# Allegro board RC-TranponderV11.brd
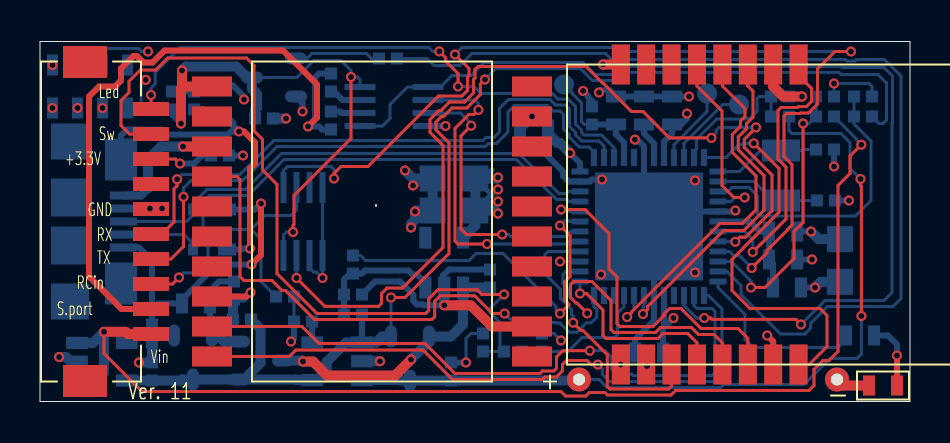
[diagram p0: board, top side]
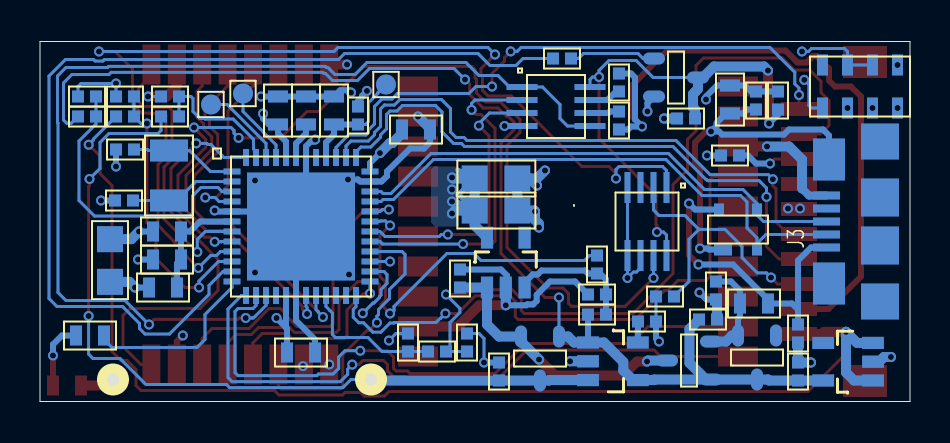
[diagram p1: board, bottom side, seen from below]

Outline 43.5 x 18 mm; copper layers: TOP, INNER_LAYER_2, INNER_LAYER_3, BOTTOM. Coordinates in mm from the lower left corner of the outline.
Outline path: 0,18 0,0 43.5,0 43.5,18 0,18

## Design rules (mm)
constraint set DEFAULT: min track width 0.15
net group DP1: nets USB_N USB_P

## Placement (name value [footprint] x y rotation side)
C1  1uF/10V  [R_0402]  5.6 1.5 270 bottom
C2  20pF  [R_0402]  39.25 12.6 0 bottom
C3  1uF/10V  [R_0402]  20.55 1.5 270 bottom
C4  100uF/4V  [R_0805]  20.7 11.15 0 bottom
C5  20pF  [R_0402]  39.3 10.05 0 bottom
C6  10uF/6V3  [R_0402]  22.5 6.15 270 bottom
C9  100nF  [R_0603]  30.45 2.45 0 bottom
C10  100nF  [R_0603]  24.7 13.6 0 bottom
C11  100nF  [R_0603]  30.2 14.55 270 bottom
C12  100nF  [R_0603]  37.15 8.5 180 bottom
C13  4.7uF  [R_0603]  37.15 7.1 180 bottom
C14  100nF / 10V  [R_0402]  11.2 14.15 180 bottom
C15  1nF  [R_0402]  9.7 5.55 90 bottom
C16  1nF  [R_0402]  5.6 3.4 90 bottom
C17  100nF  [R_0603]  31.6 14.55 270 bottom
C18  100nF  [R_0603]  28.8 14.55 270 bottom
C19  4.7nF / 1kV  [R_0603]  9 15.1 270 bottom
C20  100nF  [R_0402]  25.1 2.95 270 bottom
C21  100nF / 10V  [R_0402]  6.6 15.05 270 bottom
C22  100uF/4V  [R_0805]  20.7 9.55 0 bottom
C23  100uF/4V  [R_0805]  40 7.05 270 bottom
CLK  SWCLK  [R_1MM_TESTPOINT]  33.35 15.4 180 bottom
D4  LSQ976-Z  [R_0603]  42.15 0.8 180 top
D5  PRTR5V0U2X  [R_SOT143B]  8.6 8.6 180 bottom
D6  BAT54C  [R_SOT23_123]  7.65 2.2 90 bottom
D7  BAT54C  [R_SOT23_123]  11.05 2.05 180 bottom
DIO  SWDIO  [R_1MM_TESTPOINT]  34.95 14.85 180 bottom
FB1  470R@100MHz  [R_0603]  37.35 5.7 180 bottom
FB2  BLM18PG471SN1D  [R_0603]  7.8 4.9 0 bottom
J1  10x1_1.25mm DF13 connector  [R_CONN_DF13A-10P-1_25H]  2.85 9 90 top
J3  ZX62-AB-5PA(31)  [R_USB-ZX62-AB-5PA_31_]  1.5 9 90 bottom
Q3  RZR040P01  [R_SOT23]  11.7 16.2 0 bottom
Q4  RZR040P01  [R_SOT23]  18.5 2.15 90 bottom
R3  20k  [R_0402]  13.15 4 0 bottom
R8  100k  [R_0402]  39.25 14.25 180 bottom
R9  430k  [R_0402]  37 14.25 180 bottom
R10  100k  [R_0402]  37 15.25 0 bottom
R11  10k  [R_0402]  39.25 15.25 0 bottom
R13  1k3  [R_0603]  41 3.3 180 bottom
R15  10k  [R_0402]  17.4 17.15 0 bottom
R16  10k  [R_0402]  27.6 14.3 90 bottom
R17  1M  [R_0402]  7.7 15.05 270 bottom
R18  1k  [R_0402]  14.55 15.95 90 bottom
R19  1k  [R_0402]  14.55 14.05 270 bottom
R22  100k  [R_0402]  10.1 4.1 180 bottom
R23  1M  [R_0402]  15.65 4.35 0 bottom
R24  1M  [R_0402]  15.65 6.85 270 bottom
R25  1M  [R_0402]  15.65 5.35 180 bottom
R26  1k  [R_0402]  12.25 5.25 180 bottom
R27  10k  [R_0402]  23.65 2.5 0 bottom
R28  68R  [R_0402]  9 12.3 180 bottom
R29  10k  [R_0402]  22.15 2.95 90 bottom
R30  110k  [R_0402]  41.15 14.25 180 bottom
R31  10k  [R_0402]  41.15 15.25 0 bottom
RESET  RESET  [R_1MM_TESTPOINT]  26.2 15.85 180 bottom
U1  MCP73812  [R_SOT23-5PIN]  16.1 2.95 270 bottom
U2  REG102NA-5  [R_SOT23-5PIN]  1.85 1.05 90 bottom
U3  RT9078-33GJ5  [R_SOT23-5PIN]  21.15 5.7 180 bottom
U4  ATSAMD21G18A-48  [R_QFN48_7X7MM]  30.45 8.75 180 bottom
U6  SN74LVC2G86DCUT  [R_PDSO-G8]  13.15 9 270 bottom
U7  SN74LVC2G86DCUT  [R_PDSO-G8]  17.7 14.75 180 bottom
U8  E28-2G4M20S  [R_RFE28-2G4M20S]  39.6 9.35 90 top
U9  MS5611-01BA03  [R_LGA_8PIN_1_25X2]  2.5 15.75 270 bottom
U10  PA6H  [R_GPS_PA6H]  16.6 9 0 top
UNK+  Vbat+  [TESTPIN-0_6MM]  26.95 1.1 180 bottom
UNK-  Vbat-  [TESTPIN-0_6MM]  39.85 1.1 180 bottom
Y1  32.768kHz  [R_XTAL-ABS07]  37.05 11.3 90 bottom

## Library data of the parts
C1 C3 C4 C6 C9-C14 C17-C23 = CAP NP_0: room: P25
C2 C5 C15 C16 = Cap 0402: room: ATMEL
CLK DIO RESET UNK+ UNK- = TP_0
D4 = LM4040A41IDBZ_1
D5 = TVS_SRV_1: room: USB
D6 D7 = BAT54C: room: serial3
FB1 FB2 = FERRITE_chip_0: room: ATMEL
J1 = CON3_21: room: COMPORT
J3 = USB_CON_3: room: USB
Q3 Q4 = P_MOSFET_SOT223_1: room: PWR
R3 R8-R11 R13 R15-R19 R22-R31 = R2: room: serial3
U1 = MIC4680_9: room: P25
U2 U3 = MIC4680_4: room: P25
U4 = AT91SAM4E-BGA144_6
U6 U7 = MIC4680_15: room: P25
U8 = RJ11_30
U9 = MIC4680_16: room: P25
U10 = RJ11_22
Y1 = CRYSTAL/SM: room: ATMEL

## Footprints (pads in the part's own frame, mm; a bottom-side part is the same pattern mirrored in y, then rotated)
R_1MM_TESTPOINT
  round 1 smd: 1(0,0)
R_0402
  rect 0.6x0.6 smd: 1(-0.45,0) 2(0.45,0)
R_0603
  rect 0.6x1 smd: 1(-0.7,0) 2(0.7,0)
R_0805
  rect 1.3x1.3 smd: 1(-1.067,0) 2(1.067,0)
R_CONN_DF13A-10P-1_25H
  rect 0.7x1.8 smd: 1(-5.625,-2.7) 2(-4.375,-2.7) 3(-3.125,-2.7) 4(-1.875,-2.7) 5(-0.625,-2.7) 6(0.625,-2.7) 7(1.875,-2.7) 8(3.125,-2.7) 9(4.375,-2.7) 10(5.625,-2.7)
  rect 1.6x2.2 smd: 11(7.975,0.6) 12(-7.975,0.6)
R_GPS_PA6H
  round 0.1 hole 3: (0.2,0.8)
  rect 2x1 smd: 1(-8,6.75) 2(-8,5.25) 3(-8,3.75) 4(-8,2.25) 5(-8,0.75) 6(-8,-0.75) 7(-8,-2.25) 8(-8,-3.75) 9(-8,-5.25) 10(-8,-6.75) 11(8,-6.75) 12(8,-5.25) 13(8,-3.75) 14(8,-2.25) 15(8,-0.75) 16(8,0.75) 17(8,2.25) 18(8,3.75) 19(8,5.25) 20(8,6.75)
R_LGA_8PIN_1_25X2
  rect 1.05x0.55 smd: 1(-1.075,1.875) 2(-1.075,0.625) 3(-1.075,-0.625) 4(-1.075,-1.875) 5(1.075,-1.875) 6(1.075,-0.625) 7(1.075,0.625) 8(1.075,1.875)
R_PDSO-G8
  rect 1.55x0.3 smd: 1(-1.7,0.975) 2(-1.7,0.325) 3(-1.7,-0.325) 4(-1.7,-0.975) 5(1.7,-0.975) 6(1.7,-0.325) 7(1.7,0.325) 8(1.7,0.975)
R_QFN48_7X7MM
  rect 0.85x0.3 smd: 1(-3.45,2.75) 2(-3.45,2.25) 3(-3.45,1.75) 4(-3.45,1.25) 5(-3.45,0.75) 6(-3.45,0.25) 7(-3.45,-0.25) 8(-3.45,-0.75) 9(-3.45,-1.25) 10(-3.45,-1.75) 11(-3.45,-2.25) 12(-3.45,-2.75) 25(3.45,-2.75) 26(3.45,-2.25) 27(3.45,-1.75) 28(3.45,-1.25) 29(3.45,-0.75) 30(3.45,-0.25) 31(3.45,0.25) 32(3.45,0.75) 33(3.45,1.25) 34(3.45,1.75) 35(3.45,2.25) 36(3.45,2.75)
  rect 0.3x0.85 smd: 13(-2.75,-3.45) 14(-2.25,-3.45) 15(-1.75,-3.45) 16(-1.25,-3.45) 17(-0.75,-3.45) 18(-0.25,-3.45) 19(0.25,-3.45) 20(0.75,-3.45) 21(1.25,-3.45) 22(1.75,-3.45) 23(2.25,-3.45) 24(2.75,-3.45) 37(2.75,3.45) 38(2.25,3.45) 39(1.75,3.45) 40(1.25,3.45) 41(0.75,3.45) 42(0.25,3.45) 43(-0.25,3.45) 44(-0.75,3.45) 45(-1.25,3.45) 46(-1.75,3.45) 47(-2.25,3.45) 48(-2.75,3.45)
  rect 5.4x5.4 smd: 49(0,0)
R_RFE28-2G4M20S
  rect 2x0.9 smd: 1(-7.5,10.56) 2(-7.5,9.29) 3(-7.5,8.02) 4(-7.5,6.75) 5(-7.5,5.48) 6(-7.5,4.21) 7(-7.5,2.94) 8(-7.5,1.67) 9(7.5,1.67) 10(7.5,2.94) 11(7.5,4.21) 12(7.5,5.48) 13(7.5,6.75) 14(7.5,8.02) 15(7.5,9.29) 16(7.5,10.56)
R_SOT23
  oval 1.1x0.6 smd: 1(1.1,-0.95) 2(1.1,0.95) 3(-1.1,0)
R_SOT23-5PIN
  rect 0.61x1.092 smd: 1(0,0) 2(0.94,0) 3(1.88,0) 4(1.88,2.489) 5(0,2.489)
R_SOT23_123
  oval 1.1x0.6 smd: 1(1.1,-0.95) 2(1.1,0.95) 3(-1.1,0)
R_SOT143B
  rect 0.9x0.6 smd: 1(-0.75,-1)
  rect 0.5x0.6 smd: 2(0.95,-1) 3(0.95,1) 4(-0.95,1)
R_USB-ZX62-AB-5PA_31_
  rect 0.4x1.35 smd: 1(-1.3,2.675) 2(-0.65,2.675) 3(0,2.675) 4(0.65,2.675) 5(1.3,2.675)
  rect 2.1x1.6 smd: 6(3.1,2.55) 7(-3.1,2.55)
  rect 1.9x1.9 smd: 8(1.2,0) 9(-1.2,0)
  rect 1.8x1.9 smd: 10(-4,0) 11(4,0)
R_XTAL-ABS07
  rect 1.1x1.9 smd: 1(-1.25,0) 2(1.25,0)
TESTPIN-0_6MM
  round 1.2 hole 0.6: 1(0,0)

## Nets
+3.3V: C4.2 C9.2 C10.2 C17.2 C22.2 C23.2 FB1.1 Q3.2(S) R16.2 R28.1 U3.5(VOUT) U4.17 U4.36(VDDIO2) U4.44 U8.1(VCC)
GND: C1.1 C2.2 C3.1 C4.1 C5.2 C6.1 C9.1 C10.1 C11.1 C12.1 C13.1 C14.1 C15.1 C16.1 C17.1 C18.1 C19.1 C20.1 C21.1 C22.1 C23.1 D4.2(CATHODE) J1.6 J3.5 R3.1 R10.2 R11.2 R17.1 R22.2 R25.1 R26.1 R29.2 R31.2 U1.2 U2.2 U3.2 U4.5 U4.18 U4.35 U4.42 U4.49 U6.4 U6.5 U6.6 U7.4 U8.2 U8.7 U8.10 U8.16 U9.2 U9.3 U10.3 U10.8 U10.12 U10.19 UNK-.1
VBAT: C3.2 Q4.3 R9.1 U1.3 UNK+.1
VIN: J1.1 R8.1 U2.1 U2.3
VIN_5V: C1.2 D6.3 D7.1 Q4.1 R22.1 R23.2 R30.1 U1.1 U1.4(VDD) U2.5(VOUT)
VIN_5V_10P: R30.2 R31.1 U4.3
VIN_10P: R8.2 R11.1 U4.10
AUX_RX: J1.5 U4.38
AUX_TX: J1.4 U4.37
BARO_CS: U4.27 U9.5
BUSY: U4.20 U8.12
DIO1: U4.4 U8.13
FRSKY_INVERT: U4.15 U7.1 U7.5
FRSKY_RCIN: J1.3 R26.2 U6.2
FRSKY_SMART_PORT: J1.2 R18.2 R19.2
FRSKY_SMART_PORT_RX: U4.30 U7.3
FRSKY_SMART_PORT_TX: U4.29 U7.2
GPS_RX: U4.13 U10.10
GPS_TX: U4.14 U10.9
GPS_VBACKUP: U4.24 U10.4
LED2: R13.2 U4.12
MISO: U4.28 U8.3 U9.6
MOSI: U4.25 U8.4 U9.7
NRESET: U4.19 U8.11
NSS: U4.32 U8.6
POWER_GPS: R15.2 U4.11
POWER_ON: R24.1 U4.31
RCIN: U4.8 U6.7
RESET: C18.2 R16.1 RESET.1 U4.40
RX_EN: U4.48 U8.8
SAFTY_3V3: J1.8 R28.2
SAFTY_LED_N: J1.10 U4.39
SAFTY_SW: J1.9 R27.1 R29.1
SAFTY_SW_FILTERED: C20.2 R27.2 U4.21
SBUS_INVERT: U4.9 U6.1
SCK: U4.26 U8.5 U9.8
TX_EN: U4.7 U8.9
USB_N: D5.2 J3.2 U4.33
USB_P: D5.3 J3.3 U4.34
VGPS: C14.2 C21.2 Q3.3 U6.8(VCC) U7.8(VCC) U9.1(VDD) U10.1(VCC)
VSUPPLY: C6.2 D7.3 Q4.2(S) U3.1
VUSB: C15.2 D6.2(C2) D7.2(C2) FB2.2
XIN32: C2.1 U4.1 Y1.2
XOUT32: C5.1 U4.2 Y1.1
N17065478: C11.2 U4.43
N17065885: C12.2 C13.2 FB1.2 U4.6
N17069937: C16.2 D5.4(VCC) FB2.1 J3.1(VBUS)
N17070561: C19.2 D5.1 J3.6 R17.2
N17071769: R23.1 R24.2 R25.2 U3.3
N17071775: R3.2 U1.5
N17081259: Q3.1 R15.1
N17089733: R9.2 R10.1 U4.47
N17092983: D4.1 R13.1
N17093743: DIO.1 U4.46
N17093750: CLK.1 U4.45
N17097944: R18.1 U7.7
N17097957: R19.1 U7.6

Pads without a net: D6 1; J1 7 11 12; J3 4 7 8 9 10 11; U2 4; U3 4; U4 16 22 23 41; U6 3; U8 14 15; U9 4; U10 2 5 6 7 11 13 14 15 16 17 18 20

## Via types
v1: diameter 0.5, hole 0.3, TOP to BOTTOM, 112 vias

## Routing (per net, layer and track width the routed paths; a pad name or vN(x,y) marks a point on that pad's centre or on a via; arc(x,y) is an arc through that point)
+3.3V: length 23.9
  TOP w0.3: 29.04,1.9 v1(29.04,1.85)
  BOTTOM w0.25: 22.62,9.98 C22.2 22.62,10.4 ; 22.62,11.58 C4.2 22.62,10.3
  BOTTOM w0.3: 31.2,3.7 31.15,3.65 C9.2 ; 31.2,3.7 U4.17 ; 31.2,3.7 v1(31.68,4.17) ; Q3.2 13.13,14.92 v1(13.13,14.5) ; R16.2 27.6,15.02 27.4,15.22 27.4,15.28 v1(27.15,15.53) ; U4.44 31.2,13 31.6,13.4 C17.2 32.05,13.85 32.35,14.15 v1(32.35,14.39) ; v1(26.5,12.42) 27,11.92 U4.36 ; FB1.1 v1(38.75,5.7) ; R28.1 v1(10.15,12.3)
  BOTTOM w0.5: v1(26.5,12.42) 26,12.92 25.88,12.92 25.4,13.4 C10.2 ; C22.2 22.75,9.55 v1(22.9,9.4) ; C22.2 21.77,8.81 U3.5 ; C22.2 C4.2 22.85,11.15 v1(22.9,11.2) ; v1(38.75,5.7) 39.03,5.98 C23.2
  vias: v1(22.9,10.6) v1(22.9,10)
GND: length 100.2
  TOP w0.3: 28.2,16.9 v1(28.15,16.85) ; U10.8 10.33,5.25 v1(10.52,5.45) ; 36.66,16.9 U8.10 ; v1(36.36,3.3) 36.66,3 U8.7 ; 30.31,1.9 U8.2
  TOP w0.5: UNK-.1 40.15,0.8 D4.2 ; U8.10 36.66,15.75 37.16,15.25 v1(38.1,15.25) ; v1(20.21,4.81) 21.54,4.81 22.6,3.75 U10.12 ; v1(28.15,16.85) U8.16 ; U10.3 v1(7.15,12.75) ; U8.2 30.31,1.81 v1(30.35,1.77)
  INNER_LAYER_2 w0.25: UNK-.1 40.65,1.1 ; UNK-.1 39.85,1.9 ; UNK-.1 39.05,1.1 ; UNK-.1 39.85,0.3
  BOTTOM w0.15: U6.4 U6.5 v1(14.12,6.17) 13.83,6.47 13.68,6.47 13.48,6.67 13.48,7.3 ; R29.2 21.55,3.4 21.3,3.15 v1(21.3,1.95) ; R11.2 v1(39.7,15.9) 41.45,15.9 41.6,15.75 R31.2 ; C20.1 25.7,3.4 v1(26.05,3.05) ; U9.2 U9.3 3.12,17.5 3.27,17.65 4.92,17.65 5.08,17.5 v1(5.4,17.5) ; v1(20.27,13.78) U7.4 19.05,13.78 ; R26.1 R3.1 ; v1(38.1,15.25) R10.2
  BOTTOM w0.3: C6.1 20.45,6.6 20.15,6.3 20.15,5.76 U3.2 ; v1(10.2,15.1) 10.2,15.25 9.65,15.8 C19.1 8.25,15.8 7.95,15.5 R17.1 C21.1 ; v1(27.95,15.45) 28.06,15.56 28.49,15.56 C18.1 C11.1 C17.1 v1(32.45,15.25) ; v1(28.1,11.1) 27.6,11.1 27.5,11 U4.35 26.43,11 26.15,11.28 26.15,11.5 25,12.65 24.3,12.65 24,12.95 C10.1 ; C15.1 10.17,5.1 v1(10.52,5.45) ; C13.1 v1(38.6,7.1) ; v1(34.77,9.55) 34.72,9.5 U4.5 31.2,9.5 U4.49 30.7,8.5 U4.18 30.7,4.05 29.75,3.1 C9.1 ; C3.1 v1(21.3,1.95) ; v1(29.74,13.09) 29.84,13 29.96,13 30.2,12.76 U4.42 30.2,10.45 ; v1(12.55,3) 12.7,3.15 R3.1 ; R25.1 16.75,6 18,6 18.67,5.33 18.67,5.03 18.84,4.85 19.15,4.85 19.19,4.81 v1(20.21,4.81) ; C12.1 v1(38.55,8.5) ; C2.2 v1(39.7,11.75) ; C5.2 v1(40.45,10.05)
  BOTTOM w0.4: J3.5 5.05,10.3 5.4,10.65
  BOTTOM w0.5: C14.1 v1(12.3,14.15) ; U1.2 v1(17,2.01) ; C10.1 24,13.65 v1(24.6,14.25) ; C15.1 9.65,5.05 R22.2 ; v1(4.95,1.95) C1.1 C16.1 ; 19,11.15 v1(18.65,10.8) ; 19,11.15 18.65,11.15 v1(18.25,11.55) ; 19,11.15 C4.1 C22.1 18.8,9.55 v1(18.75,9.5) 18.75,9.09 18.57,8.9 18.57,8.72 v1(18.55,8.7) ; v1(38.55,8.5) 38.93,8.12 C23.1 ; v1(0.95,2.23) 1.14,2.23 1.3,2.22 1.53,1.99 U2.2 ; U3.2 v1(20.21,4.81) ; 5.4,10.65 5.4,12.1 6.05,12.75 v1(7.15,12.75)
  vias: v1(5.5,9.65) v1(6.1,9.65) v1(28.05,6.35) v1(32.75,11.05) v1(32.75,6.45)
VBAT: length 40.7
  TOP w0.15: v1(41.07,4.28) 41.07,10.75 41.02,10.8 v1(41.02,11.12)
  BOTTOM w0.15: R9.1 37.45,13.55 37.6,13.4 40.05,13.4 40.5,12.95 40.5,11.65 v1(41.02,11.12) ; UNK+.1 27.95,1.1 28.36,0.69 34.02,0.69 34.17,0.85 38.2,0.85 39.5,2.15 40.85,2.15 41.07,2.37 v1(41.07,4.28)
  BOTTOM w0.5: U1.3 18.03,1.07 18.05,1.05 Q4.3 C3.2 26.9,1.05 UNK+.1
VIN: length 60.5
  TOP w0.15: v1(3.2,3.48) 3.2,2.4 5.1,0.5 26.05,0.5 26.27,0.28 27.29,0.28 27.47,0.45 28.25,0.45 28.37,0.33 31.55,0.33 31.78,0.55 38.45,0.55 38.7,0.8 38.7,1.6 39.15,2.05 39.45,2.05 39.9,2.5 39.9,10.8 40.5,11.4 40.5,12.28 v1(41.06,12.84)
  TOP w0.5: v1(3.2,3.48) 4.29,3.48 4.4,3.38 J1.1
  BOTTOM w0.15: v1(41.06,12.84) 40.83,13.07 40.83,13.12 R8.1
  BOTTOM w0.5: U2.1 2.8,1.05 3.2,1.45 v1(3.2,3.48) 2.65,2.93 U2.3
VIN_5V: length 59.3
  TOP w0.15: v1(22.25,16.1) 22.02,15.87 22.02,15.35 21.35,14.68 20.6,14.68 20.18,14.25 20.08,14.25 19.8,13.97 19.8,13.58 20.45,12.93 20.45,7.4 18.25,5.2 v1(17.55,5.2)
  BOTTOM w0.15: v1(22.25,16.1) 22.8,16.65 27.03,16.65 27.63,16.05 28.87,16.05 29.22,16.4 29.3,16.4 29.36,16.46 39.94,16.46 40.05,16.35 41.9,16.35 42.33,15.93 42.33,14.07 42.16,13.91 41.94,13.91 R30.1 ; Q4.1 v1(17.55,5.2)
  BOTTOM w0.3: R23.2 U1.1
  BOTTOM w0.5: 10.2,1.1 11.03,1.93 11.03,3.62 R22.1 ; 10.2,1.1 12.79,1.1 12.81,1.07 U1.4 13.85,1.07 14.33,1.55 14.33,1.98 15.3,2.95 U1.1 16.8,2.95 17.1,3.25 Q4.1 ; 10.2,1.1 D7.1 D6.3 7.1,1.1 7.05,1.05 C1.2 U2.5
VIN_5V_10P: length 14.7
  BOTTOM w0.15: R31.1 R30.2 40.7,13.88 41.55,13.03 41.55,10.05 40.77,9.28 36.01,9.28 35.88,9.41 35.88,10.28 35.45,10.7 34.6,10.7 34.4,10.5 U4.3
VIN_10P: length 13.9
  TOP w0.15: v1(35.55,5.7) 36.25,5.7 37.7,7.15 37.7,8.5 38.15,8.95 v1(38.15,13.9)
  BOTTOM w0.15: v1(35.55,5.7) 35.55,6.03 34.58,7 U4.10 ; v1(38.15,13.9) 38.45,13.9 R8.2 R11.1
AUX_RX: length 29.4
  TOP w0.15: v1(6.86,11.11) 6.86,10.79 6.7,10.63 6.7,8.97 6.1,8.38 J1.5
  BOTTOM w0.15: v1(6.86,11.11) 7.09,11.34 9.99,11.34 11.7,13.05 22.15,13.05 22.3,13.2 22.7,13.2 22.98,13.48 22.98,14.65 23.43,15.1 25.5,15.1 25.78,14.82 26.28,14.82 26.48,14.63 26.48,13.75 26.77,13.45 26.77,13.33 27.08,13.03 27.95,13.03 28.2,12.78 U4.38
AUX_TX: length 29.4
  TOP w0.15: v1(7.17,10.23) 7.17,7.75 6.55,7.12 J1.4
  BOTTOM w0.15: U4.37 27.7,12.47 27.45,12.72 26.96,12.72 26.48,13.21 26.48,13.33 26.18,13.63 26.18,14.35 26,14.53 25.65,14.53 25.38,14.8 23.73,14.8 23.4,14.47 23.4,13.48 22.82,12.9 22.42,12.9 22.27,12.75 11.85,12.75 10.2,11.1 10.17,11.1 10.12,11.04 7.54,11.04 7.17,10.68 v1(7.17,10.23)
BARO_CS: length 45.8
  INNER_LAYER_3 w0.15: v1(5.29,16.08) 5.16,15.95 4.9,15.95 4.55,15.6 4.55,14.6 2.7,12.75 2.7,2.25 3.55,1.4 23.25,1.4 23.4,1.55 23.4,3.45 26,6.05 v1(26,7)
  BOTTOM w0.15: v1(5.29,16.08) 5.06,15.85 5.06,14.81 4.92,14.68 U9.5 ; U4.27 v1(26,7)
BUSY: length 18.4
  TOP w0.15: 34.12,16.9 U8.12 34.12,15.78 35.25,14.64 35.25,14.25 35.02,14.02 35.02,13.77 34.97,13.72 34.97,13.71 34.61,13.35 34.61,12.46 35.8,11.28 35.8,9.59 35.11,8.9 34,8.9 29.58,4.48 29.58,4.45 v1(29.35,4.22)
  BOTTOM w0.15: v1(29.35,4.22) 29.58,4.45 29.58,4.48 29.7,4.6 U4.20
DIO1: length 9.4
  TOP w0.15: U8.13 32.85,15.78 34.1,14.53 34.1,10.8 34.7,10.2 v1(35.24,10.2)
  BOTTOM w0.15: U4.4 34.55,10 34.74,10.2 v1(35.24,10.2)
FRSKY_INVERT: length 52.1
  TOP w0.15: v1(33.21,4.17) 33.54,4.17 33.61,4.11 37.79,4.11 v1(38.05,3.85)
  BOTTOM w0.15: v1(38.05,3.85) 39.25,5.05 42.2,5.05 42.6,5.45 42.6,13.93 42.62,13.95 42.62,16.27 42.2,16.7 40.12,16.7 40.07,16.76 29.23,16.76 29.18,16.7 29.1,16.7 28.75,16.35 27.75,16.35 27.15,16.95 22.2,16.95 21.55,16.3 20.6,16.3 20.02,15.72 U7.1 18.38,15.72 17.5,14.85 17.5,14.15 17.12,13.78 U7.5 15.65,13.78 ; v1(33.21,4.17) 32.89,4.17 32.88,4.18 32.82,4.18 32.2,4.8 U4.15
FRSKY_RCIN: length 14.1
  TOP w0.15: J1.3 6.62,5.88 v1(6.95,6.2)
  BOTTOM w0.15: v1(6.95,6.2) 7.18,6.43 7.63,6.43 8.4,7.2 8.4,7.75 9.25,8.6 10.55,8.6 ; R26.2 11.05,6 11.05,8.11 10.55,8.6 ; U6.2 12.82,9.57 12.55,9.3 11.25,9.3 10.55,8.6
FRSKY_SMART_PORT: length 33.4
  TOP w0.3: v1(13.4,13.75) 13.85,14.2 13.85,15.85 12.15,17.55 6.23,17.55 5.63,16.95 5.17,16.95 4.85,17.27 4.67,17.27 4.05,16.65 4.05,16.05 3.75,15.75 2.95,15.75 2.45,15.25 2.45,6.25 4.08,4.62 J1.2
  BOTTOM w0.3: R18.2 13.95,16.4 13.75,16.2 13.75,14.1 v1(13.4,13.75) 13.95,13.75 14.1,13.6 R19.2
FRSKY_SMART_PORT_RX: length 14.4
  TOP w0.15: v1(23.11,8.35) 21.32,8.35 21.05,8.62 21.05,13.28 v1(21.56,13.79)
  BOTTOM w0.15: U4.30 26.5,8.5 26.25,8.25 23.54,8.25 23.44,8.35 v1(23.11,8.35) ; 19.05,14.43 U7.3 21.02,14.43 21.45,14 21.45,13.9 21.48,13.88 21.48,13.87 v1(21.56,13.79)
FRSKY_SMART_PORT_TX: length 16.8
  TOP w0.15: v1(22.35,7.88) 20.9,7.88 20.75,8.03 20.75,13.66 21.44,14.35 21.69,14.35 v1(21.92,14.58)
  BOTTOM w0.15: v1(22.35,7.88) 26.38,7.88 26.5,8 U4.29 ; 19.05,15.07 U7.2 21.75,15.07 21.92,14.9 v1(21.92,14.58)
GPS_RX: length 32.1
  TOP w0.15: U10.10 12.47,2.25 12.8,2.58 19.15,2.58 20.63,1.1 25.12,1.1 25.25,1.23 25.82,1.23 26.12,1.53 26.12,1.85 26.32,2.05 27.36,2.05 27.56,1.85 v1(27.89,1.85)
  BOTTOM w0.15: U4.13 33.42,5.3 34.1,4.62 34.1,1.2 33.89,0.99 28.48,0.99 28.12,1.36 28.12,1.62 v1(27.89,1.85)
GPS_TX: length 32.6
  TOP w0.15: U10.9 13.1,3.75 13.95,2.9 19.25,2.9 20.75,1.4 25,1.4 25.12,1.52 25.69,1.52 25.82,1.66 25.82,2.23 26.14,2.54 v1(27.49,2.54)
  BOTTOM w0.15: U4.14 32.7,4.8 32.85,4.65 33.6,4.65 33.75,4.5 33.75,1.45 33.6,1.29 29.66,1.29 29.58,1.38 28.84,1.38 28.56,1.65 28.56,2.22 28.25,2.54 v1(27.49,2.54)
GPS_VBACKUP: length 28.2
  TOP w0.15: v1(23.23,4.4) 22.62,4.4 21.74,5.29 20.01,5.29 19.74,5.01 19.74,4.24 19.6,4.1 13.73,4.1 12.28,5.55 12.1,5.55 11.6,6.05 10.2,6.05 10,6.25 10,11.1 9.85,11.25 U10.4
  BOTTOM w0.15: v1(23.23,4.4) 23.46,4.17 23.48,4.17 23.7,3.95 25.78,3.95 25.8,3.92 26,3.92 26.46,3.47 26.85,3.47 27.32,3.94 27.56,3.94 27.84,4.21 27.84,4.61 27.7,4.74 U4.24
LED2: length 9
  BOTTOM w0.15: R13.2 40.3,3.1 39.9,2.7 35.65,2.7 35.25,3.1 35.25,4.35 33.9,5.7 U4.12
MISO: length 55.5
  TOP w0.15: U8.3 31.58,0.78 31.43,0.62 28.5,0.62 28.37,0.76 28.37,2.33 27.15,3.55 27.05,3.55 v1(26.66,3.94)
  INNER_LAYER_3 w0.15: v1(3.12,14.68) 1.95,13.5 1.95,1.65 2.95,0.65 24.2,0.65 24.35,0.8 24.35,3.1 25.18,3.92 26.2,3.92 26.21,3.94 v1(26.66,3.94)
  BOTTOM w0.15: v1(26.66,3.94) 26.66,4.27 26.57,4.35 26.57,4.6 26.02,5.15 26.02,5.61 25.25,6.38 25.25,7.35 25.4,7.5 U4.28
MOSI: length 53.5
  TOP w0.15: v1(27,5.4) 27.32,5.4 28.15,4.58 28.15,3.3 28.3,3.15 30.9,3.15 31.15,3.4 32.38,3.4 32.85,2.94 U8.4
  INNER_LAYER_3 w0.15: v1(1.88,14.68) 1.88,15.05 2.02,15.2 3.55,15.2 3.7,15.05 3.7,14.25 2.3,12.85 2.3,1.9 3.15,1.05 23.6,1.05 23.95,1.4 23.95,3.2 26.15,5.4 v1(27,5.4)
  BOTTOM w0.15: v1(27,5.4) U4.25
NRESET: length 17.5
  TOP w0.15: 35.39,16.9 U8.11 35.39,15.78 35.65,15.52 35.65,14.22 35.33,13.9 35.33,13.65 35.27,13.59 35.27,13.59 34.91,13.23 34.91,12.59 36.2,11.3 36.2,9.56 35.19,8.55 34.18,8.55 30.38,4.75 30.38,4.61 v1(30.15,4.38)
  BOTTOM w0.15: U4.19 30.2,4.75 30.15,4.7 v1(30.15,4.38)
NSS: length 17.5
  TOP w0.15: U8.6 35.39,3.16 34.9,3.65 33.05,3.65 32.05,4.65 31.48,4.65 31.2,4.37 31.2,4.3 30.65,3.75 29,3.75 28.85,3.9 28.85,6.22 28.45,6.62 28.45,8.4 27.25,9.6 v1(26.06,9.6)
  BOTTOM w0.15: U4.32 26.5,9.5 26.45,9.55 26.43,9.55 26.38,9.6 v1(26.06,9.6)
POWER_GPS: length 48.8
  BOTTOM w0.15: R15.2 19.35,17.15 19.7,16.8 21,16.8 21.6,17.4 28.27,17.4 28.57,17.1 40.28,17.1 40.35,17.02 40.75,17.02 40.82,17.1 42.22,17.1 43.05,16.27 43.05,5.15 42.65,4.75 39.37,4.75 38.52,3.9 38.52,3.65 38.25,3.38 37.02,3.38 35.05,5.35 35.05,5.8 34.35,6.5 U4.11
POWER_ON: length 18.1
  TOP w0.15: v1(26,8.8) 26.5,8.3 26.5,6.25 26.23,5.97 26.23,5.08 26.45,4.85 v1(26,4.4)
  BOTTOM w0.15: R24.1 16.02,7.3 16.27,7.05 21.45,7.05 21.8,7.4 23.15,7.4 25.8,4.75 25.8,4.55 25.95,4.4 v1(26,4.4) ; v1(26,8.8) 26.23,9.03 26.47,9.03 26.5,9 U4.31
RCIN: length 45.4
  TOP w0.15: v1(34.76,7.99) 34.99,8.22 35.28,8.22 36.6,9.54 36.6,11.32 35.21,12.71 35.21,13.1 35.57,13.46 35.57,13.47 v1(35.8,13.7) ; v1(33.57,13.18) 31.47,13.18 30.15,14.5 29.57,14.5 28.15,15.93 28.12,15.93 27.3,16.75 21.9,16.75 21.75,16.6 21.75,16.18 21.68,16.1 21.68,15.43 21.22,14.97 20.48,14.97 20.05,14.55 19.95,14.55 19.5,14.1 19.5,13.45 20.15,12.8 20.15,7.7 18.12,5.67 17.35,5.67 17.07,5.4 17.07,4.91 16.93,4.76 14.24,4.76 v1(12.82,6.17)
  BOTTOM w0.15: v1(34.76,7.99) 34.44,7.99 34.42,8 U4.8 ; v1(33.57,13.18) 33.8,13.41 33.8,13.55 33.95,13.7 v1(35.8,13.7) ; U6.7 v1(12.82,6.17)
RESET: length 5.8
  BOTTOM w0.15: RESET.1 26.61,15.44 26.61,15.41 27.07,14.94 27.07,14 27.23,13.85 R16.1
  BOTTOM w0.3: U4.40 29.2,12.95 28.8,13.35 C18.2 R16.1
RX_EN: length 20.2
  TOP w0.15: v1(35.69,12.91) 36.95,11.65 36.95,9.46 35.16,7.67 35.16,7.66 34.6,7.1 34.6,5.55 35.5,4.65 39,4.65 39.35,4.3 39.35,2.75 38.45,1.85 U8.8
  BOTTOM w0.15: U4.48 34.3,12.2 34.95,12.85 35.1,12.85 35.16,12.9 35.36,12.9 35.36,12.91 v1(35.69,12.91)
SAFTY_3V3: length 3.3
  TOP w0.15: J1.8 6.77,12.12 v1(7,11.9)
  BOTTOM w0.3: R28.2 8.1,12.3 7.7,11.9 v1(7,11.9)
SAFTY_LED_N: length 29
  TOP w0.15: v1(20.9,15.75) 20.9,16.4 20.27,17.03 20.27,17.2 v1(19.97,17.51) ; v1(5.55,15.32) J1.10
  BOTTOM w0.15: v1(19.97,17.51) 19.64,17.51 19.45,17.7 7,17.7 5.76,16.46 5.76,15.88 5.55,15.67 v1(5.55,15.32) ; U4.39 28.7,12.7 28.07,13.32 27.21,13.32 27.07,13.46 27.07,13.58 26.77,13.88 26.77,14.75 26.4,15.12 25.9,15.12 25.62,15.4 22.05,15.4 21.7,15.75 v1(20.9,15.75)
SAFTY_SW: length 39.4
  TOP w0.15: v1(23.2,5.35) 22.1,5.35 21.86,5.59 19.89,5.59 19.44,5.13 19.44,4.55 19.29,4.4 13.85,4.4 11.85,6.4 11.85,10.85 11.12,11.57 11.12,13.11 10.7,13.53 10.7,16.8 10.33,17.18 6.38,17.18 5.78,16.57 5.02,16.57 4.45,16.01 4.45,15.45 4.05,15.05 4.05,13.8 4.48,13.38 J1.9
  BOTTOM w0.15: v1(23.2,5.35) 22.51,4.66 22.51,4.44 23,3.95 23,2.7 R27.1 R29.1
SAFTY_SW_FILTERED: length 7.2
  BOTTOM w0.15: U4.21 29.2,4.75 29,4.55 29,4.54 28.88,4.42 28.88,3.35 28.73,3.2 27.1,3.2 26.4,2.5 C20.2 R27.2
SBUS_INVERT: length 51.1
  TOP w0.15: v1(14.7,11.15) 14.7,11.4 15.05,11.75 16.4,11.75 19.93,15.28 21.1,15.28 21.38,15.55 21.38,16.22 21.45,16.3 21.45,16.65 v1(20.75,17.35) ; v1(40.55,17.5) 39.75,17.5 38.88,16.62 38.88,14.88 38.42,14.43 38.03,14.43 38,14.4 37.33,14.4 37.2,14.28 37.2,12.24 37.6,11.84 37.6,8.82 37.4,8.62 37.4,8.6 36.35,7.55 36.35,7.44 v1(35.59,6.68)
  BOTTOM w0.15: v1(35.59,6.68) 34.96,7.3 34.68,7.3 34.48,7.5 U4.9 ; 12.18,10.7 12.18,11.55 12.38,11.75 14.55,11.75 14.7,11.6 v1(14.7,11.15) ; v1(20.75,17.35) 21.1,17.7 28.6,17.7 28.8,17.5 v1(40.55,17.5)
SCK: length 59.5
  TOP w0.15: v1(27.36,4.41) 26.85,4.92 26.8,4.92 26.52,5.2 26.52,5.85 26.68,6 27.6,6 28.55,5.05 28.55,3.6 28.7,3.45 30.77,3.45 31.02,3.7 32.58,3.7 32.93,3.35 33.7,3.35 34.12,2.94 U8.5
  INNER_LAYER_3 w0.15: v1(27.36,4.41) 27.13,4.18 27.13,3.74 26.85,3.47 26.46,3.47 26.3,3.62 25.52,3.62 24.65,2.75 24.65,0.68 24.32,0.35 2.58,0.35 1.5,1.43 1.5,13.8 v1(0.62,14.68)
  BOTTOM w0.15: v1(27.36,4.41) 26.85,4.92 26.8,4.92 26.52,5.2 26.52,5.25 26.45,5.32 26.45,5.6 26.32,5.72 26.32,5.73 26.15,5.9 26.15,6.35 26.3,6.5 U4.26
TX_EN: length 14.4
  TOP w0.15: U8.9 37.93,16.3 38.58,15.65 38.58,15 38.32,14.75 37.93,14.75 37.88,14.7 37.05,14.7 36.9,14.55 36.9,12.12 37.3,11.72 37.3,9.12 36.05,7.87 36.03,7.87 v1(35.64,7.48)
  BOTTOM w0.15: v1(35.64,7.48) 35.64,8.1 35.24,8.5 U4.7
USB_N: length 26.8
  BOTTOM w0.15: 7.65,7.9 7.65,8.18 8.15,8.68 8.15,9.98 8.47,10.3 10.4,10.3 12.2,12.1 23.83,12.1 25.83,10.1 26.35,10.1 26.45,10 U4.33 ; 7.65,7.9 7.2,8.35 J3.2 ; 7.65,7.9 D5.2
USB_P: length 25.4
  BOTTOM w0.15: J3.3 7.32,9 7.65,9.33 D5.3 7.65,9.9 8.35,10.6 10.28,10.6 12.08,12.4 23.95,12.4 25.95,10.4 26.35,10.4 26.45,10.5 U4.34
VGPS: length 35
  TOP w0.15: v1(15.55,16.23) 15.55,13.15 12.7,10.3 12.7,8.85 12.65,8.8 v1(12.65,8.47)
  TOP w0.3: 7.1,15.8 7.15,15.75
  TOP w0.5: v1(7.05,13.9) 7.05,15.65 7.15,15.75 U10.1 ; v1(7.1,16.55) 7.1,15.8
  INNER_LAYER_3 w0.15: v1(7.1,16.55) 5.75,16.55 5.3,17 1.12,17 0.95,16.82 v1(0.62,16.82)
  BOTTOM w0.15: Q3.3 12.84,16.2 13.69,17.05 15.05,17.05 15.55,16.55 v1(15.55,16.23) 15.88,16.23 16,16.1 U7.8 ; 12.18,7.3 12.18,8.32 12.33,8.47 v1(12.65,8.47)
  BOTTOM w0.3: v1(7.05,13.9) 6.6,14.35 C21.2
  BOTTOM w0.5: v1(7.1,16.55) 7.3,16.75 9.8,16.75 10.35,16.2 Q3.3 10.6,15.63 10.75,15.48 10.75,15.47 10.85,15.37 10.85,14.7 10.75,14.6 C14.2
VSUPPLY: length 13.7
  TOP w0.5: v1(13.15,2) 13.65,2 14.35,1.3 17.75,1.3 v1(18.55,2.1)
  BOTTOM w0.5: C6.2 U3.1 21.15,3.85 20.55,3.25 Q4.2 19.45,3 v1(18.55,2.1) ; v1(13.15,2) 13.1,2.05 D7.3
VUSB: length 5.2
  BOTTOM w0.3: C15.2 8.95,6 8.5,5.55 FB2.2 8.5,4.25 8.6,4.15 D6.2
  BOTTOM w0.5: D6.2 8.9,3.3 9.2,3 D7.2
XIN32: length 5.4
  BOTTOM w0.15: U4.1 34.98,11.5 36.02,12.55 Y1.2 38.08,12.55 38.12,12.6 C2.1
XOUT32: length 5.3
  BOTTOM w0.15: C5.1 Y1.1 36.65,10.05 35.7,11 U4.2
N17065478: length 1.9
  BOTTOM w0.3: C11.2 30.2,13.4 30.7,12.9 U4.43
N17065885: length 5.6
  BOTTOM w0.3: FB1.2 36.65,6.9 C13.2 C12.2 36,8.5 35.5,9 U4.6
N17069937: length 15.8
  TOP w0.3: v1(10.58,6.85) 11.05,7.33 v1(11.05,9.9)
  BOTTOM w0.3: J3.1 4.95,7.7 5.6,7.05 5.6,4.6 ; 5.6,4.6 C16.2 ; 5.6,4.6 5.9,4.9 FB2.1 7.1,5.1 8.85,6.85 v1(10.58,6.85) ; v1(11.05,9.9) 10.75,9.6 D5.4
N17070561: length 17.8
  TOP w0.3: v1(9.95,13.5) 10.2,13.5 10.75,12.95 10.75,11.9 10.5,11.65 v1(10.5,7.65)
  BOTTOM w0.3: D5.1 10.05,7.6 10.1,7.65 v1(10.5,7.65) ; J3.6 4.05,13.3 4.35,13.6 6.05,13.6 6.3,13.35 9.4,13.35 9.55,13.5 v1(9.95,13.5) 9.67,13.78 9.67,13.93 9.2,14.4 C19.2 8.35,14.4 8.15,14.6 R17.2
N17071769: length 6.5
  BOTTOM w0.3: R23.1 R25.2 15.2,6.1 15.5,6.4 R24.2 16.1,6.4 16.25,6.55 18.42,6.55 18.62,6.35 18.86,6.35 19.27,5.94 U3.3
N17071775: length 1.1
  BOTTOM w0.3: R3.2 13.6,3.55 13.61,3.54 U1.5
N17081259: length 4.4
  BOTTOM w0.15: Q3.1 13.35,17.15 13.6,17.4 16.32,17.4 16.57,17.15 R15.1
N17089733: length 7
  BOTTOM w0.15: U4.47 32.7,12.5 32.83,12.62 32.83,13.11 33.84,14.12 35.25,14.12 35.28,14.15 35.5,14.15 35.85,14.5 35.85,15.15 35.95,15.25 R10.1 R9.2
N17092983: length 3.4
  TOP w0.3: D4.1 v1(42.85,2.3)
  BOTTOM w0.3: R13.1 42.4,3.3 42.85,2.85 v1(42.85,2.3)
N17093743: length 4.3
  BOTTOM w0.15: U4.46 32.2,12.91 34.14,14.85 DIO.1
N17093750: length 3.9
  BOTTOM w0.15: U4.45 31.7,12.83 32.33,13.46 32.33,13.47 33.35,14.5 CLK.1
N17097944: length 1.6
  BOTTOM w0.3: U7.7 15.12,15.07 14.7,15.5 R18.1
N17097957: length 1.5
  BOTTOM w0.3: R19.1 15,14.5 15.07,14.43 U7.6

## Copper pours and planes (outline as drawn; the poured copper is in the pictures)
+3.3V on BOTTOM: 20.8,8.9 20.8,7.6 20.85,7.55 21.45,7.55 21.6,7.7 21.6,8.6 21.75,8.75 23.75,8.75 23.95,8.95 23.95,11.6 23.8,11.75 21.35,11.75 21.05,11.45 21.05,9.1 20.85,8.9
+3.3V on INNER_LAYER_3: 44.05,19.05 44.05,-1.2 0.05,-1.2 0.05,19.05 ; 3 cut-outs
GND on INNER_LAYER_2: 44.3,19.4 44.3,-1.45 -0.5,-1.45 -0.5,19.4

## Text on the board
Ref Des/Silkscreen Top: S.port | +3.3V | RCin | GND | RX | TX | Led | Sw | Vin | Ver. 11
User.11: FIGURE | FINISHED_SIZE | 0.3 | 0.6 | 3.0 | DRILL CHART: TOP to BOTTOM | ALL UNITS ARE IN MILLIMETERS | TOLERANCE_DRILL | +0.05/-0.05 | +0.08/-0.08 | +0.1/-0.1 | PLATED | QTY | 112 | 2 | 1
